# EAGLE board UTN-Clase-Electronica02_001-CottierSolange-C3 (EAGLE 9.7.0)

Size 173.01 x 73.49 mm. Coordinates in mm from the lower left corner, seen from the top.
Outline: 0,0 173.01,0 173.01,73.49 0,73.49 0,0
Copper layers (1*16): Top 0.035mm / dielectric 1.5mm / Bottom 0.035mm
Design rules "default": minimum track width 6mil, minimum drill 0.35mm, track to track 6mil, track to pad 6mil, pad to pad 6mil, via to via 6mil, smd to smd 6mil, copper to edge 40mil, drill to drill 6mil, minimum pad ring 10mil, minimum via ring 8mil, stop-mask expansion 4mil, vias tented up to drill 0mil, thermal gap 10mil

## Footprints (pad centres in the part's own frame; a part is rotated, then mirrored left to right if it is on the bottom)
BATTERY-GENERIC = drill 1.118 pad 3.15 octagon: + 2.54,0; - -2.54,0
LEDRD254W60D565H860B = drill 0.981 pad 1.581: 1 -1.27,0; 2 1.27,0
PIEZO = drill 1 pad 1.6: 1 -3.5,0; 2 3.5,0
RESAD1016W63L850D250B = drill 0.83 pad 1.43: 1 -5.08,0; 2 5.08,0
SWITCH-SPDT-PTH-8.5X3.7MM = drill 1.016 pad 1.88: 1 -2.54,0; 2 0,0; 3 2.54,0
SWITCH-MOMENTARY-PTH-6.5MM = drill 1.016 pad 1.88: 1 -3.251,2.261; 2 3.251,2.261; 3 -3.251,-2.261; 4 3.251,-2.261

## Placement (x,y rotation side)
BAT1  9V  [BATTERY-GENERIC]  8.26,8.26 180 top
D1  RED  [LEDRD254W60D565H860B]  47,60.3 180 top
D2  RED  [LEDRD254W60D565H860B]  29.39,60.3 180 top
D3  RED  [LEDRD254W60D565H860B]  10.99,59.91 180 top
PIEZO1  PIEZO  [PIEZO]  161.27,59.91 0 top
R2  1k  [RESAD1016W63L850D250B]  72.83,26.26 270 top
S1  TOGGLE  [SWITCH-SPDT-PTH-8.5X3.7MM]  97.87,40.35 270 top
S2  SWITCH_MOMENTARY  [SWITCH-MOMENTARY-PTH-6.5MM]  127.62,53.65 0 top

## Library data of the parts
BAT1 PIEZO1 R2 S1 S2 = Tinkercad
D1-D3 = Tinkercad; CATEGORY: Opto-Electronic; SUB-CATEGORY: LED; VALUE: LED_RED

## Nets
BAT1+: BAT1.+ PIEZO1.2 R2.2 S2.3
BAT1-: BAT1.- D3.2
D1_C: D1.2 D2.1
D2_C: D2.2 D3.1
S1_O: S1.1 S2.1
S1_P: D1.1 S1.2
S1_S: PIEZO1.1 R2.1 S1.3

## Tracks (layer width: path | path; a pad name or v marks a point on that pad's centre or on a via)
BAT1+  (3 unrouted)
BAT1-  (1 unrouted)
D1_C  (1 unrouted)
D2_C  (1 unrouted)
S1_O  (1 unrouted)
S1_P  (1 unrouted)
S1_S  (2 unrouted)